# Altium PCB dc_dc_converter.PcbDoc
Units mm, origin at the board's own origin, x right, y up, seen from the top; angles counter-clockwise.
Board outline 70 x 40 mm, 2 copper layers (Top Layer, Bottom Layer); 9 components, 4 nets, 24 pads, 200 vias.
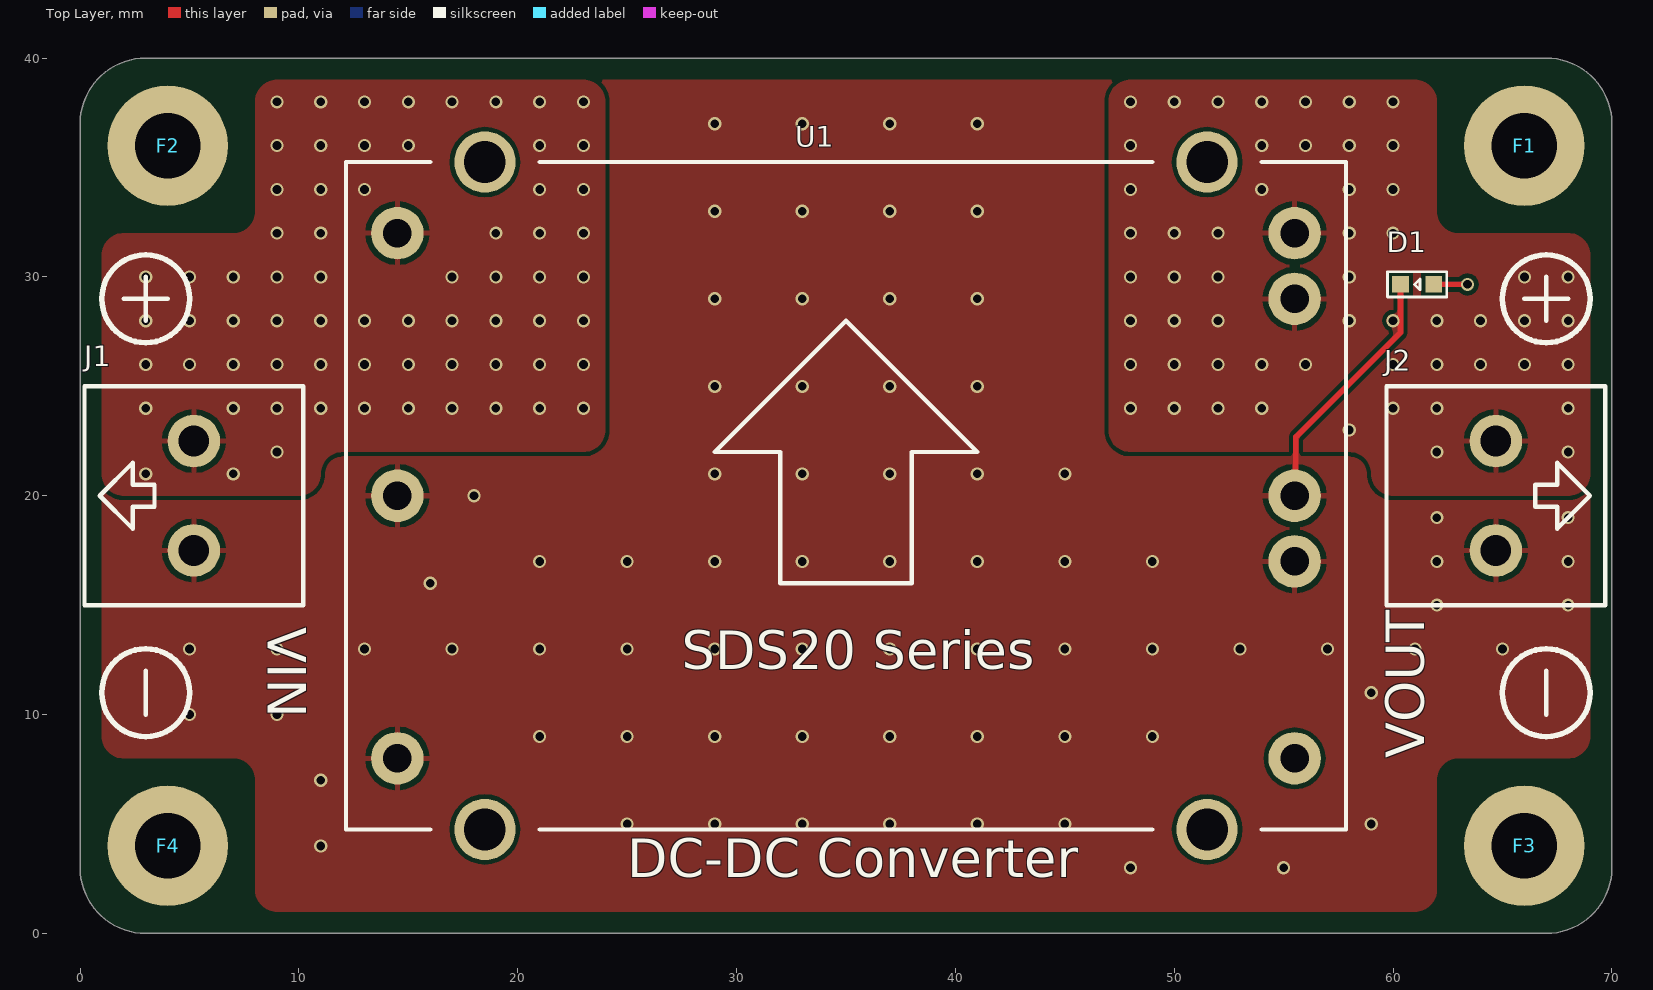
[diagram p0: Top Layer view]
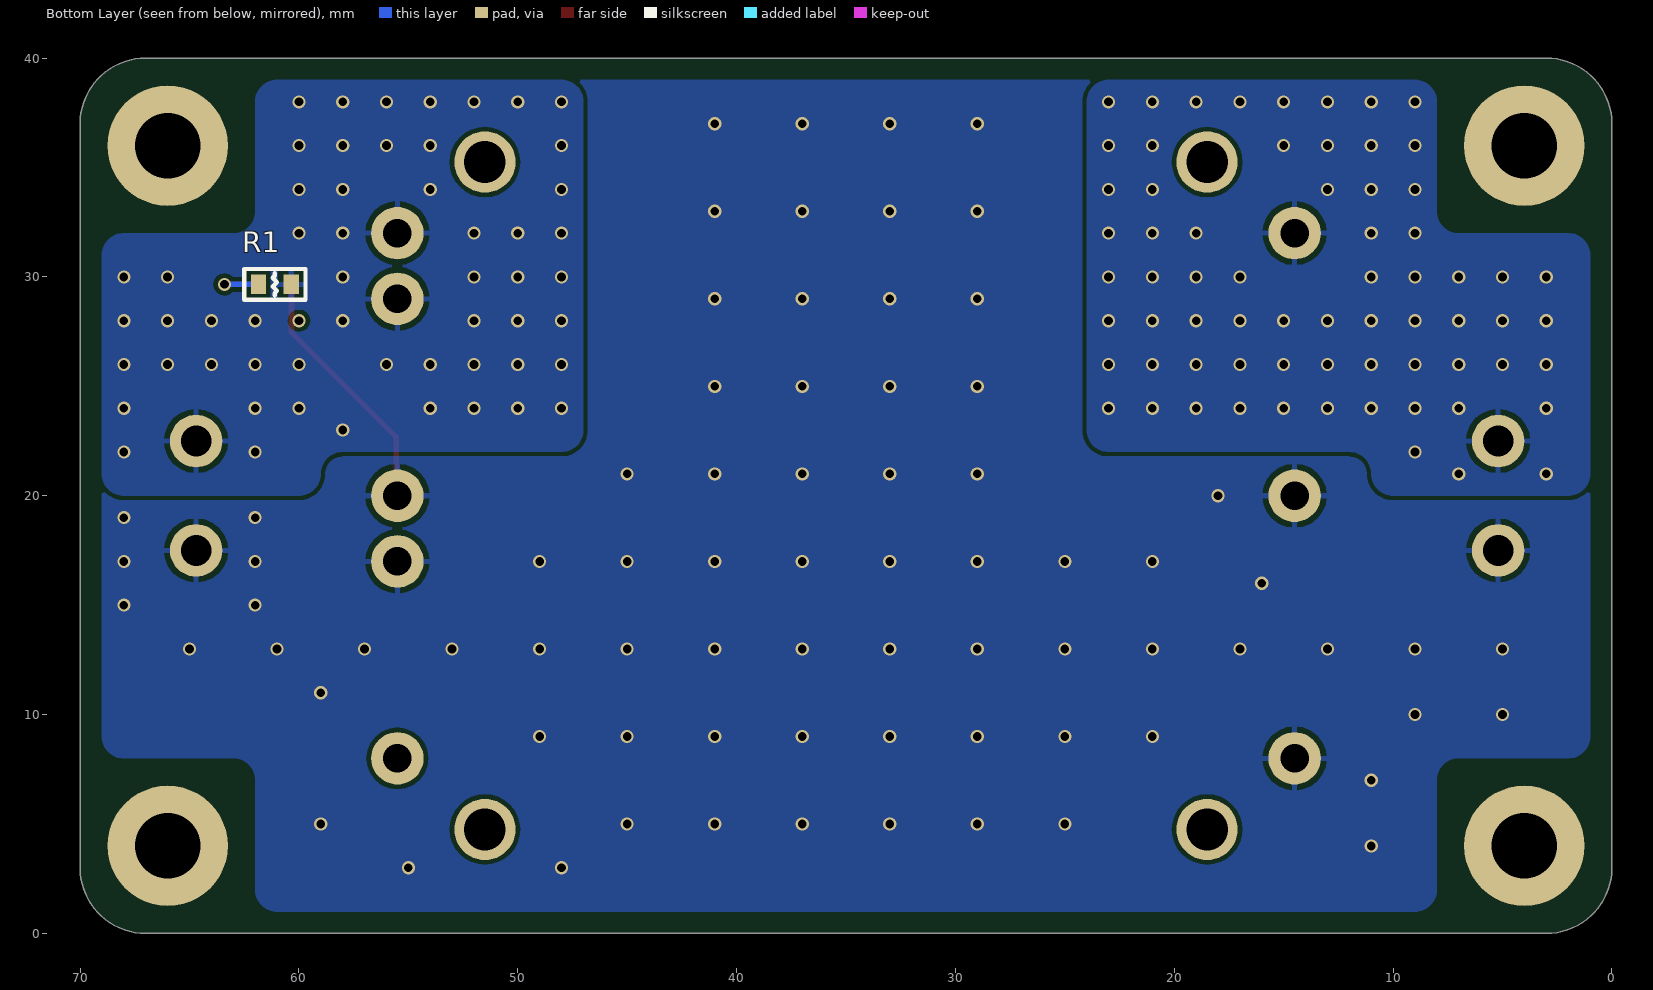
[diagram p1: Bottom Layer view, seen from below]
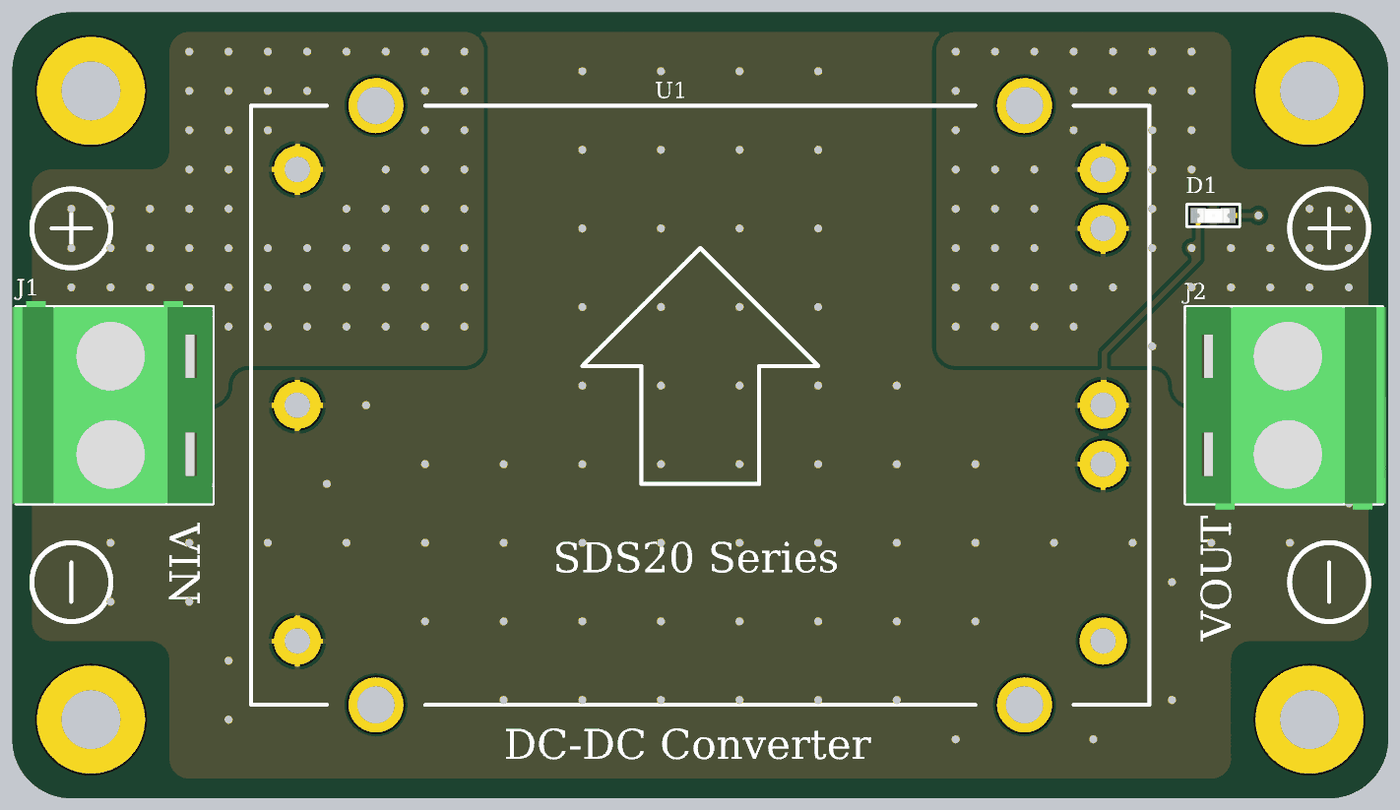
[diagram p2: 3D render of the assembled board from above, using the file's embedded part models]

## Layer stack, top to bottom
Top Solder: solder mask 0.0102, Solder Resist, Dk 3.5
Top Layer: signal copper 0.0356
Dielectric 1: dielectric 0.32, FR-4, Dk 4.8
Bottom Layer: signal copper 0.0356
Bottom Solder: solder mask 0.0102, Solder Resist, Dk 3.5

## Board outline
0,3 0,37 cw(c3,37) 3,40 67,40 cw(c67,37) 70,37 70,3 cw(c67,3) 67,0 3,0 cw(c3,3)

## Design rules (kind name [scope] priority, off if disabled: settings)
Clearance [All] p1: gap=0.2 ignorepadtopadclearanceinfootprint=FALSE
HoleSize [All] p1: absolutevalues=TRUE maxlimit=3.2 minlimit=0.025 maxpercent=80.000 minpercent=20.000
PolygonConnect PolygonConnect_1 [IsVia] p1: connectstyle=Direct reliefconductorwidth=0.254 reliefentries=4 polygonreliefangle="90 Angle" airgapwidth=0.254
PolygonConnect [All] p2: connectstyle=Relief reliefconductorwidth=0.254 reliefentries=4 polygonreliefangle="90 Angle" airgapwidth=0.254
RoutingVias [All] p1: holewidth=0.4 width=0.6 viastyle="Through Hole" minholewidth=0.4 minwidth=0.6 maxholewidth=0.4 maxwidth=0.6
SilkToSolderMaskClearance [IsPad] p1: minsilkscreentomaskgap=0.1 clearancetoexposedcopper=TRUE
SolderMaskExpansion [All] p1: expansion=0.102
Width [All] p1: maxlimit=2 minlimit=0.2 preferedwidth=0.2
28 further rules are at their usual default settings.

## Components (designator, comment, footprint, x,y, rotation, side; value= is the part's Value field where it differs from the comment)
D1 "LED" LED1608L 61.1,29.66 r0 top value=PWR(R)
F1 "FIXED_HOLE" FIXED_HOLE_PAD 66,36 r0 top
F2 "FIXED_HOLE" FIXED_HOLE_PAD 4,36 r0 top
F3 "FIXED_HOLE" FIXED_HOLE_PAD 66,4 r0 top
F4 "FIXED_HOLE" FIXED_HOLE_PAD 4,4 r0 top
J1 "CON2" DG128-5.0-02P 5.2,20 r270 top
J2 "CON2" DG128-5.0-02P 64.7,20 r90 top
R1 "R" RES1608L 61.1,29.66 r180 bottom value=1K
U1 "SDS20-24-12" SDS20-24-12 35,20 r0 top

## Footprints (in the part's own frame and the unit in brackets; to place one, negate y for a bottom-side part, rotate by r counter-clockwise, add the part's x,y. Pads: shape width x height; smd on the part's side, far side on the other; paste and mask are expansions set on the pad)
DG128-5.0-02P [mm]
  round 2.4 hole 1.4: 1(2.5,0) 2(-2.5,0)
  silkscreen extent -5,-5 5,5, body extent -5.3,-5.2 5,5, height 14.1
FIXED_HOLE_PAD [mm]
  round 5.5 hole 3: 1(0,0)
LED1608L [mil]
  rect 30x30 smd: 1(-30,0) 2(30,0)
  silkscreen extent -53,-22 53,22, body extent -32,-14 33,14, height 27
RES1608L [mm]
  rect 0.7x0.9 smd: 1(-0.75,0) 2(0.75,0)
  silkscreen extent -1.4,-0.7 1.4,0.7, body extent -0.77,-0.43 0.77,0.43, height 0.45
SDS20-24-12 [mm]
  round 2.4 hole 1.3: 1(-20.5,12) 2(-20.5,0) 3(-20.5,-12) 4(20.5,-12) 5(20.5,-3) 6(20.5,0) 7(20.5,9) 8(20.5,12)
  round 2.8 hole 1.9: 9(-16.5,15.25) 10(16.5,15.25) 11(-16.5,-15.25) 12(16.5,-15.25)
  silkscreen extent -22.85,-15.25 22.85,15.25, body extent -22.85,-15.25 22.85,15.25, height 9.5

## Part data
D1: "Typical LED"
J1 J2: "Generic Connector 2 Pin"
R1: "Resistor"

## Via types
v1: diameter 0.6, hole 0.4, Top Layer to Bottom Layer, tented both sides, 200 vias

## Nets (pads, with @x,y where several pads share a name; then routed paths per layer and width w, separated by ;. In a path a pad name is that pad's centre, name@x,y a point inside that pad or via, vN(x,y) a via of type N, cw(c..) or ccw(c..) an arc to the next point about the centre after c; other vN are vias at no path point)
+12V: J2.1 R1.2 U1.7 U1.8
  other v1: 62,22 68,22 58,23 48,24 50,24 52,24 54,24 60,24 62,24 68,24 48,26 50,26 52,26 54,26 56,26 60,26 62,26 64,26 66,26 68,26 48,28 50,28 52,28 58,28 62,28 64,28 66,28 68,28 48,30 50,30 52,30 58,30 66,30 68,30 48,32 50,32 52,32 58,32 60,32 48,34 54,34 58,34 60,34 48,36 54,36 56,36 58,36 60,36 48,38 50,38 52,38 54,38 56,38 58,38 60,38
GND: D1.1 J1.1 J2.2 U1.2 U1.3 U1.5 U1.6 | length 11.6
  Top Layer w0.254: U1.6@55.56,20 55.56,22.684 60.338,27.462 D1.1
  other v1: 48,3 55,3 11,4 25,5 29,5 33,5 37,5 41,5 45,5 59,5 11,7 21,9 25,9 29,9 33,9 37,9 41,9 45,9 49,9 5,10 9,10 59,11 5,13 9,13 13,13 17,13 21,13 25,13 29,13 33,13 37,13 41,13 45,13 49,13 53,13 57,13 61,13 65,13 62,15 68,15 16,16 21,17 25,17 29,17 33,17 37,17 41,17 45,17 49,17 62,17 68,17 62,19 68,19 18,20 29,21 33,21 37,21 41,21 45,21 29,25 33,25 37,25 41,25 60,28 29,29 33,29 37,29 41,29 29,33 33,33 37,33 41,33 29,37 33,37 37,37 41,37
NetD1_2: D1.2 R1.1 | length 3.1
  Top Layer w0.254: D1.2 v1(63.4,29.66)
  Bottom Layer w0.254: R1.1 v1(63.4,29.66)
NetJ1_2: J1.2 U1.1
  other v1: 3,21 7,21 9,22 3,24 7,24 9,24 11,24 13,24 15,24 17,24 19,24 21,24 23,24 3,26 5,26 7,26 9,26 11,26 13,26 15,26 17,26 19,26 21,26 23,26 3,28 5,28 7,28 9,28 11,28 13,28 15,28 17,28 19,28 21,28 23,28 3,30 5,30 7,30 9,30 11,30 17,30 19,30 21,30 23,30 9,32 11,32 19,32 21,32 23,32 9,34 11,34 13,34 21,34 23,34 9,36 11,36 13,36 15,36 21,36 23,36 9,38 11,38 13,38 15,38 17,38 19,38 21,38 23,38
pads on no net: F1.1 F2.1 F3.1 F4.1 U1.4 U1.9 U1.10 U1.11 U1.12

## Polygon pours and split planes (outlines as drawn)
GND on Top Layer "GND_L01_P004" (solid, remove dead copper, pour order 4): 2,32 ccw(c2,31) 1,31 1,9 ccw(c2,9) 2,8 7,8 cw(c7,7) 8,7 8,2 ccw(c9,2) 9,1 61,1 ccw(c61,2) 62,2 62,7 cw(c63,7) 63,8 68,8 ccw(c68,9) 69,9 69,31 ccw(c68,31) 68,32 63,32 cw(c63,33) 62,33 62,38 ccw(c61,38) 61,39 9,39 ccw(c9,38) 8,38 8,33 cw(c7,33) 7,32
+12V on Top Layer "+12V_L01_P002" (solid, remove dead copper, pour order 2): 47,38 cw(c48,38) 48,39 61,39 cw(c61,38) 62,38 62,33 ccw(c63,33) 63,32 68,32 cw(c68,31) 69,31 69,21 cw(c68,21) 68,20 60,20 cw(c60,21) 59,21 ccw(c58,21) 58,22 48,22 cw(c48,23) 47,23
NetJ1_2 on Top Layer "NETJ1_2_L01_P000" (solid, remove dead copper, pour order 0): 7,32 ccw(c7,33) 8,33 8,38 cw(c9,38) 9,39 23,39 cw(c23,38) 24,38 24,23 cw(c23,23) 23,22 12,22 ccw(c12,21) 11,21 cw(c10,21) 10,20 2,20 cw(c2,21) 1,21 1,31 cw(c2,31) 2,32
GND on Bottom Layer "GND_L02_P010" (solid, remove dead copper, pour order 10): 2,32 ccw(c2,31) 1,31 1,9 ccw(c2,9) 2,8 7,8 cw(c7,7) 8,7 8,2 ccw(c9,2) 9,1 61,1 ccw(c61,2) 62,2 62,7 cw(c63,7) 63,8 68,8 ccw(c68,9) 69,9 69,31 ccw(c68,31) 68,32 63,32 cw(c63,33) 62,33 62,38 ccw(c61,38) 61,39 9,39 ccw(c9,38) 8,38 8,33 cw(c7,33) 7,32
+12V on Bottom Layer "+12V_L02_P008" (solid, remove dead copper, pour order 8): 47,38 cw(c48,38) 48,39 61,39 cw(c61,38) 62,38 62,33 ccw(c63,33) 63,32 68,32 cw(c68,31) 69,31 69,21 cw(c68,21) 68,20 60,20 cw(c60,21) 59,21 ccw(c58,21) 58,22 48,22 cw(c48,23) 47,23
NetJ1_2 on Bottom Layer "NETJ1_2_L02_P006" (solid, remove dead copper, pour order 6): 7,32 ccw(c7,33) 8,33 8,38 cw(c9,38) 9,39 23,39 cw(c23,38) 24,38 24,23 cw(c23,23) 23,22 12,22 ccw(c12,21) 11,21 cw(c10,21) 10,20 2,20 cw(c2,21) 1,21 1,31 cw(c2,31) 2,32

## Silkscreen, mask and mechanical layers (free items; w line width, h text height)
Top Overlay:
  circle w0.254: c67,11 r2.01
  circle w0.254: c67,29 r2.01
  circle w0.254: c3,11 r2.01
  circle w0.254: c3,29 r2.01
  lines w0.2: 2,29 4,29 ; 3,10 3,12 ; 3,28 3,30 ; 66,29 68,29 ; 67,10 67,12 ; 67,28 67,30
  text "VIN" at 8,14 h3 r270
  text "VOUT" at 62,8 h3 r90
  text "DC-DC Converter" at 25,2 h3
Mechanical 1:
  the board outline again, w0.2

## Text inside footprints (layer, text, board x,y; h text height)
U1: Top Overlay "SDS20 Series" at 27.5,11.5 h3